# Altium PCB PCB1.PcbDoc
Units mm, origin at the board's own origin, x right, y up, seen from the top; angles counter-clockwise.
Board outline 30 x 23 mm, 2 copper layers (Top Layer, Bottom Layer), stack 1.534 mm thick; 6 components, 4 nets, 20 pads, 0 vias.
Unrouted connection lines stored in the file: 2.
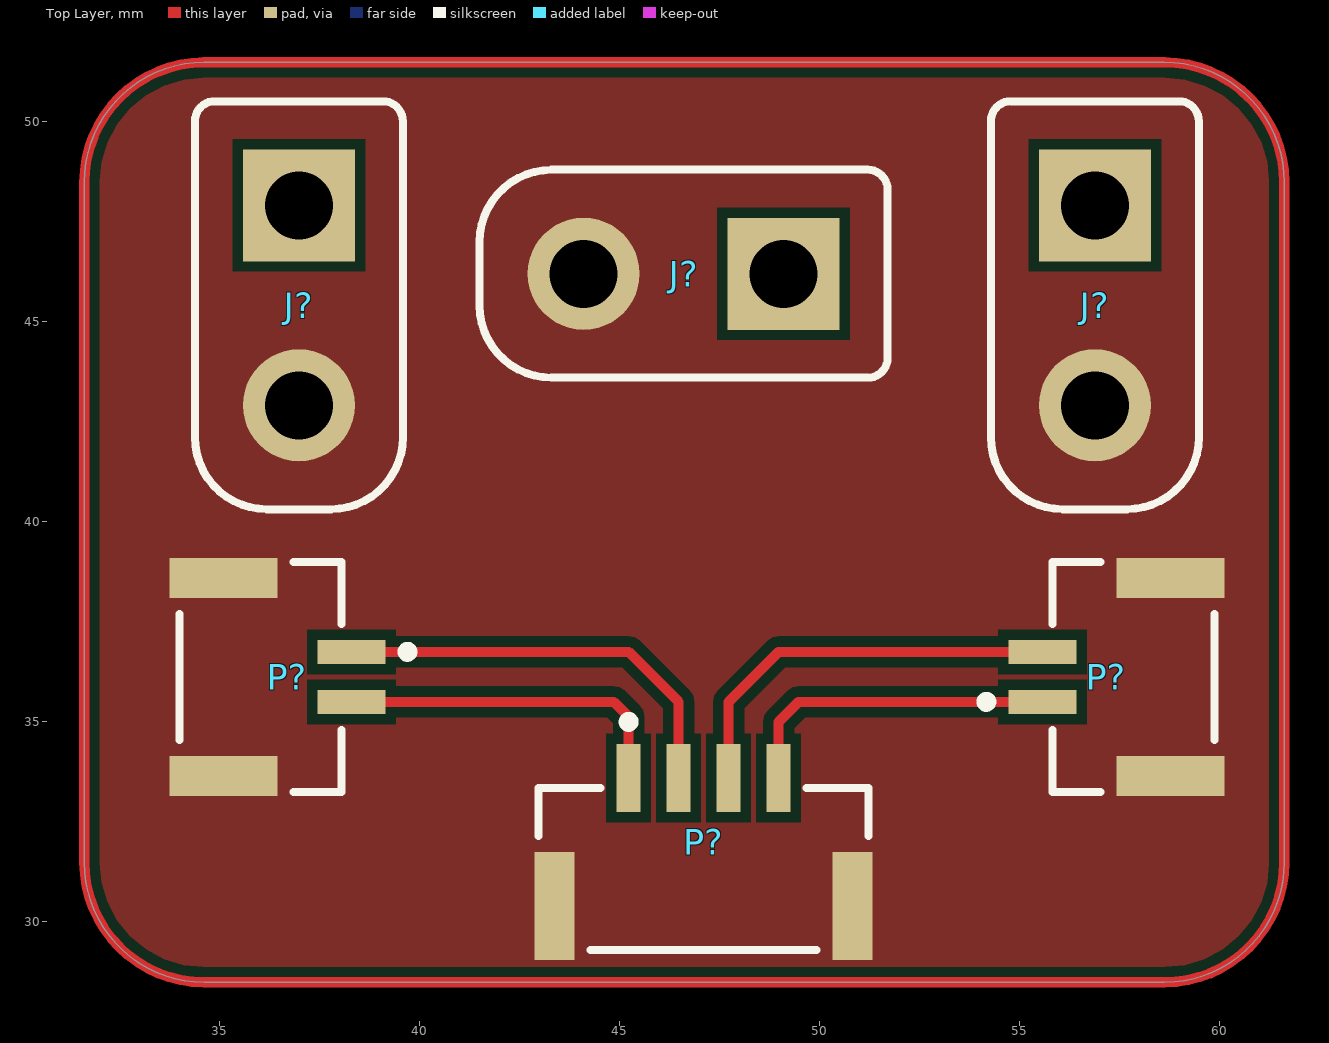
[diagram p0: Top Layer view]
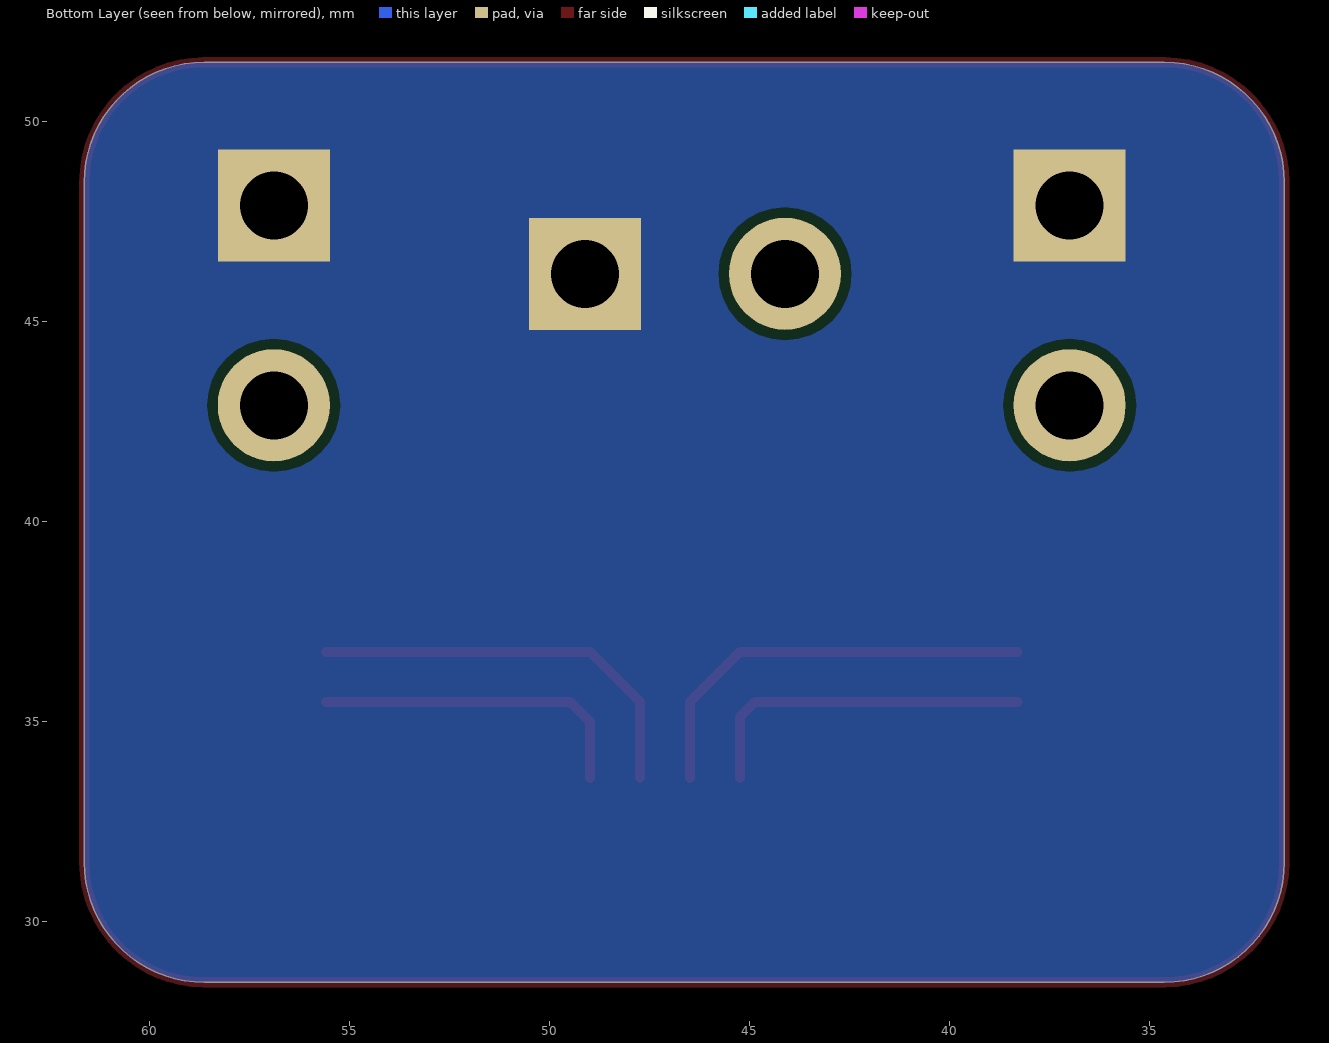
[diagram p1: Bottom Layer view, seen from below]
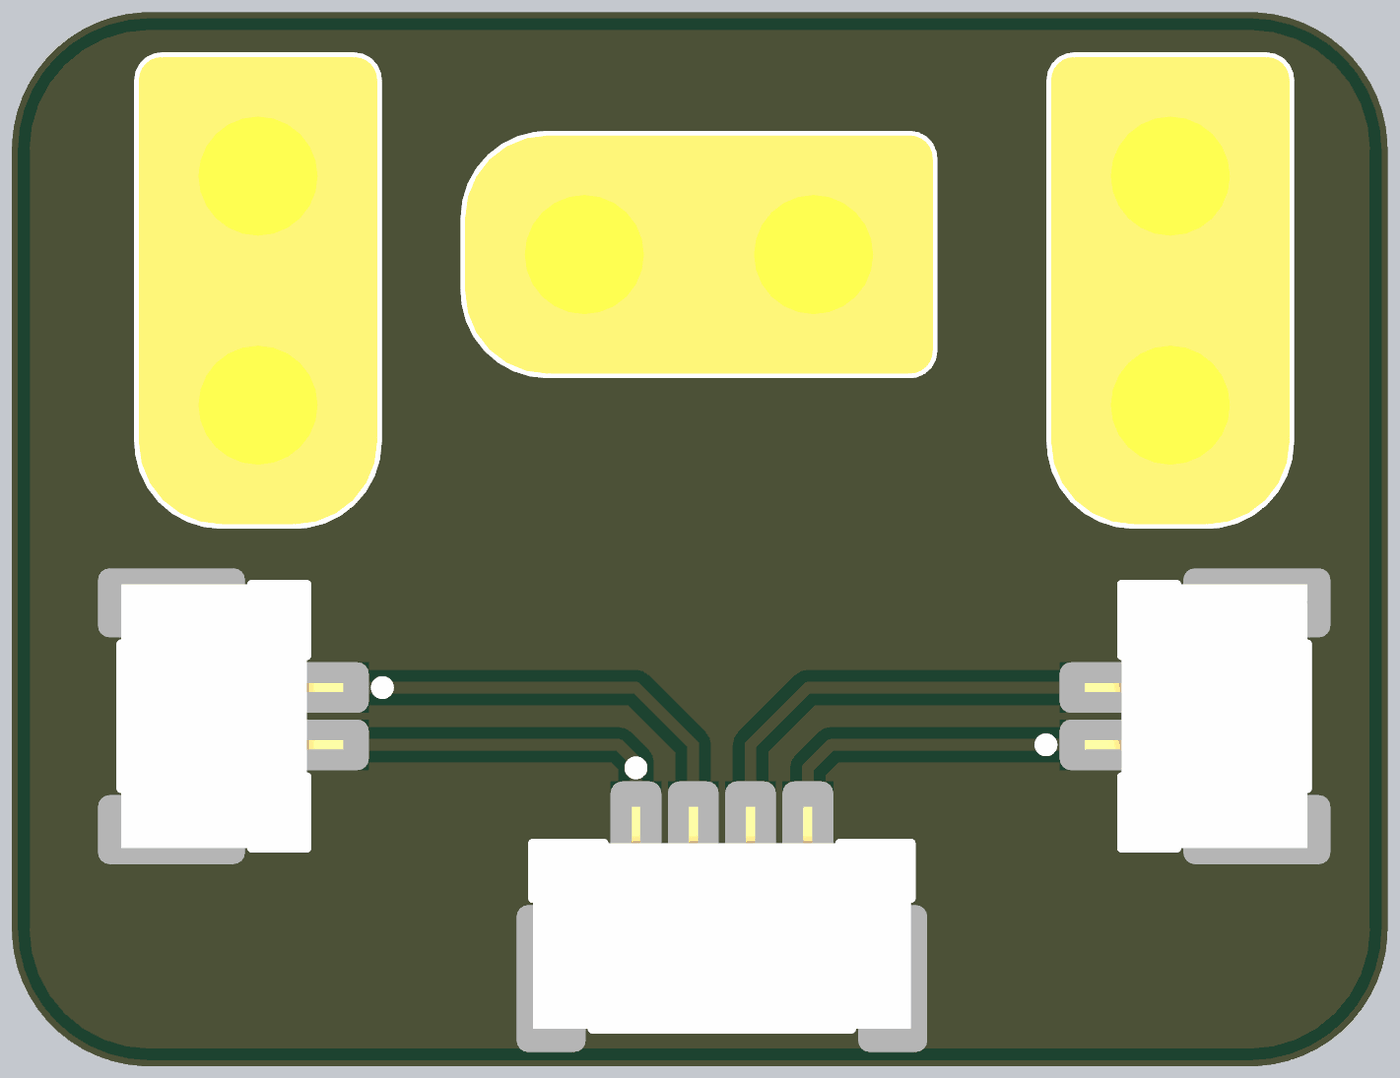
[diagram p2: 3D render of the assembled board from above, using the file's embedded part models]

## Layer stack, top to bottom
Top Solder: solder mask 0.0127, Solder Resist, Dk 3.3
Top Layer: signal copper 0.0178
Dielectric1: core 1.4986, FR-4, Dk 4.3
Bottom Layer: signal copper 0.0178
Bottom Solder: solder mask 0.0127, Solder Resist, Dk 3.3

## Board outline
31.623,31.473 31.623,48.473 cw(c34.623,48.473) 34.623,51.473 58.623,51.473 cw(c58.623,48.473) 61.623,48.473 61.623,31.473 cw(c58.623,31.473) 58.623,28.473 34.623,28.473 cw(c34.623,31.473)

## Design rules (kind name [scope] priority, off if disabled: settings)
Clearance Clearance_1 [OnMid vs OnMid] p1: gap=0.254 ignorepadtopadclearanceinfootprint=FALSE sourcerule=39 cellrowname=All cellrowtype=0 cellcolname=All cellcoltype=0 innerlayers=TRUE
Clearance Clearance_2 [(ExistsOnLayer('Top Layer') Or ExistsOnLayer('Bottom Layer')) vs (ExistsOnLayer('Top Layer') Or ExistsOnLayer('Bottom Layer'))] p2: gap=0.254 ignorepadtopadclearanceinfootprint=FALSE sourcerule=39 cellrowname=All cellrowtype=0 cellcolname=All cellcoltype=0 outerlayers=TRUE
Clearance [All] p3: gap=0.254 ignorepadtopadclearanceinfootprint=FALSE ismatrix=TRUE
DiffPairsRouting [All] p1: maxlimit=0.254 minlimit=0.254 mostfreqgap=0.254 toplayer_minwidth=0.254 toplayer_maxwidth=0.254 toplayer_prefwidth=0.254 bottomlayer_minwidth=0.254 bottomlayer_maxwidth=0.254 bottomlayer_prefwidth=0.254 maxuncoupledlength=12.7
HoleSize [All] p1: absolutevalues=TRUE maxlimit=7.62 minlimit=0.254 maxpercent=80.000 minpercent=20.000
MinimumAnnularRing [All] p1: minimumring=0.254
PasteMaskExpansion [All] p1: expansion=0.254
PlaneClearance [All] p1: clearance=0.381
PlaneConnect [All] p1: pad.planeconnectstyle=Relief pad.reliefexpansion=0.508 pad.reliefentries=4 pad.reliefconductorwidth=0.254 pad.reliefairgap=0.254 via.planeconnectstyle=Direct via.reliefexpansion=0.508 via.reliefentries=4 via.reliefconductorwidth=0.254 via.reliefairgap=0.254
PolygonConnect [All] p1: connectstyle=Direct reliefconductorwidth=0.254 reliefentries=4 polygonreliefangle="90 Angle" airgapwidth=0.254
RoomDefinition Sheet1 [InComponentClass('Sheet1')] p1: confinementstyle=ConfineIn formatcopy=TRUE lockcomponents=FALSE outline 39.167,12.649 84.074,12.649 84.074,25.908 39.167,25.908
RoutingVias [All] p1: holewidth=0.254 width=0.508 viastyle="Through Hole" minholewidth=0.254 minwidth=0.508 maxholewidth=0.254 maxwidth=0.508
SMDNeckDown [All] p1: percent=100.000
SilkToSolderMaskClearance SilkscreenOverComponentPads [IsPad] p1: minsilkscreentomaskgap=0.254 clearancetoexposedcopper=TRUE
SolderMaskExpansion [All] p1: expansion=0.254 istentingtop=FALSE
Width [All] p1: maxlimit=0.254 minlimit=0.254 preferedwidth=0.254
24 further rules are at their usual default settings.

## Classes and differential pairs
component class Sheet1: J? P?
differential pair NewDifferentialPair1: +H -L

## Components (designator, comment, footprint, x,y, rotation, side; value= is the part's Value field where it differs from the comment)
J? "XT30UPB-F" AMASS-XT30UPB-F 56.887,45.4 r270 top
J? "XT30UPB-F" AMASS-XT30UPB-F 36.988,45.4 r270 top
J? "XT30UPB-F" AMASS-XT30UPB-F 46.606,46.188 r180 top
P? "SM02B-GHHD-B-TB(LF)(SN)" JST-SM02B-GHS-TB_V 57.174,36.11 r90 top
P? "SM04B-GHHD-B-TB(LF)(SN)" JST-SM04B-GHS-TB_V 47.106,31.984 r0 top
P? "SM02B-GHHD-B-TB(LF)(SN)" JST-SM02B-GHS-TB_V 36.701,36.11 r270 top

## Footprints (in the part's own frame and the unit in brackets; to place one, negate y for a bottom-side part, rotate by r counter-clockwise, add the part's x,y. Pads: shape width x height; smd on the part's side, far side on the other; paste and mask are expansions set on the pad)
AMASS-XT30UPB-F [mm] "TH, 2-Leads, Body 10.2x5.2mm, Pitch 5.00mm"
  rect 2.8x2.8 hole 1.7: 1(-2.5,0)
  round 2.8 hole 1.7: 2(2.5,0)
  silkscreen extent -5.1,-2.6 5.1,2.6, body extent -5.1,-2.6 5.1,2.6, height 9.45
JST-SM02B-GHS-TB_V [mm] "SMD, 2-Leads, Body 5.75x4.05mm, Pitch 1.25mm"
  rect 0.6x1.7 smd: 1(-0.625,1.6) 2(0.625,1.6)
  rect 1x2.7 smd: MP1(-2.475,-1.6) MP2(2.475,-1.6)
  silkscreen extent -2.88,-2.7 2.88,3.12, body extent -2.87,-2.7 2.88,2.15, height 4.35
JST-SM04B-GHS-TB_V [mm] "SMD, 4-Leads, Body 8.25x4.05mm, Pitch 1.25mm"
  rect 0.6x1.7 smd: 1(-1.875,1.6) 2(-0.625,1.6) 3(0.625,1.6) 4(1.875,1.6)
  rect 1x2.7 smd: MP1(-3.725,-1.6) MP2(3.725,-1.6)
  silkscreen extent -4.12,-2.7 4.13,3.12, body extent -4.12,-2.7 4.13,2.15, height 4.35

## Part data
J? J? J?: library part CMP-002-00125-1, "XT Series Lithium Battery Female Connector, 2-pin TH", Manufacturer=AMASS, Design Item ID=XT30UPB-F, Manufacturer URL=http://www.china-amass.com, Part Number=XT30UPB-F, Publisher="Bolgen Studio", Source="Changzhou Amass Lithium Battery Connector.SchLib"
P? P?: library part CMP-010-000034-1, "GH Disconnectable Crimp Style Connector, Pitch 1.25 mm, 1 x 2 Position, Height 4.25 mm, -25 to 85 degC, RoHS, Tape and Reel", Manufacturer=JST, Package Description="GH Disconnectable Crimp Style Connector, Pitch 1.25 mm, 1 x 2 Position, Height 4.25 mm", Package Reference=SM02B-GHS-TB, Datasheet URL=http://www.jst-mfg.com/product/pdf/eng/eGH.pdf, Datasheet Version=05/2016, Design Item ID=SM02B-GHHD-B-TB(LF)(SN), Manufacturer URL=http://www.jst.com/home2.html, Mounting Technology=SurfaceMount, No of Positions=2, Pitch=1.25mm, Source="JST GH connector.SchLib", Style/Orientation=RightAngleHeader/Plug, Termination=Crimp, Type=WiretoBoard
P?: library part CMP-010-000035-1, "GH Disconnectable Crimp Style Connector, Pitch 1.25 mm, 1 x 4 Position, Height 4.25 mm, -25 to 85 degC, RoHS, Tape and Reel", Manufacturer=JST, Package Description="GH Disconnectable Crimp Style Connector, Pitch 1.25 mm, 1 x 4 Position, Height 4.25 mm", Package Reference=SM04B-GHS-TB, Datasheet URL=http://www.jst-mfg.com/product/pdf/eng/eGH.pdf, Datasheet Version=05/2016, Design Item ID=SM04B-GHHD-B-TB(LF)(SN), Manufacturer URL=http://www.jst.com/home2.html, Mounting Technology=SurfaceMount, No of Positions=4, Pitch=1.25mm, Source="JST GH connector.SchLib", Style/Orientation=RightAngleHeader/Plug, Termination=Crimp, Type=WiretoBoard

## Nets (pads, with @x,y where several pads share a name; then routed paths per layer and width w, separated by ;. In a path a pad name is that pad's centre, name@x,y a point inside that pad or via, vN(x,y) a via of type N, cw(c..) or ccw(c..) an arc to the next point about the centre after c; other vN are vias at no path point)
GND: J?.2 P?.MP1 P?.MP2
H: P?.1@38.301,36.735 P?.1@55.574,35.485 P?.2@46.481,33.584 P?.4 | length 18.8
  Top Layer w0.254: P?.1@38.301,36.735 45.231,36.735 46.481,35.485 P?.2@46.481,33.584 ; P?.4 48.981,34.984 49.483,35.485 P?.1@55.574,35.485
L: P?.1@45.231,33.584 P?.2@38.301,35.485 P?.2@55.574,36.735 P?.3 | length 18.9
  Top Layer w0.254: P?.2@38.301,35.485 44.855,35.485 45.231,35.109 P?.1@45.231,33.584 ; P?.3 47.731,35.485 48.981,36.735 P?.2@55.574,36.735
VCC: J?.1
copper on no net: | length 100.8
  Top Layer w0.254: 31.623,31.473 ccw(c34.623,31.473) 34.623,28.473 58.623,28.473 ccw(c58.623,31.473) 61.623,31.473 61.623,48.473 ccw(c58.623,48.473) 58.623,51.473 34.623,51.473 ccw(c34.623,48.473) 31.623,48.473 31.623,31.473

## Polygon pours and split planes (outlines as drawn)
GND on Top Layer "GND_L01_P000" (solid, pour order 0): 31.623,31.473 31.623,48.473 cw(c34.623,48.473) 34.623,51.473 58.623,51.473 cw(c58.623,48.473) 61.623,48.473 61.623,31.473 cw(c58.623,31.473) 58.623,28.473 34.623,28.473 cw(c34.623,31.473)
GND on Top Layer "GND_L01_P001" (solid, pour order 1): 31.623,31.473 31.623,48.473 cw(c34.623,48.473) 34.623,51.473 58.623,51.473 cw(c58.623,48.473) 61.623,48.473 61.623,31.473 cw(c58.623,31.473) 58.623,28.473 34.623,28.473 cw(c34.623,31.473)
VCC on Bottom Layer "VCC_L02_P002" (solid, pour order 2): 31.623,31.473 31.623,48.473 cw(c34.623,48.473) 34.623,51.473 58.623,51.473 cw(c58.623,48.473) 61.623,48.473 61.623,31.473 cw(c58.623,31.473) 58.623,28.473 34.623,28.473 cw(c34.623,31.473)